# Altium PCB bldcPCB.PcbDoc
Units mm, origin at the board's own origin, x right, y up, seen from the top; angles counter-clockwise.
Board outline 70.76 x 100 mm, 2 copper layers (Top Layer, Bottom Layer); 67 components, 44 nets, 223 pads, 35 vias.
Unrouted connection lines stored in the file: 104.
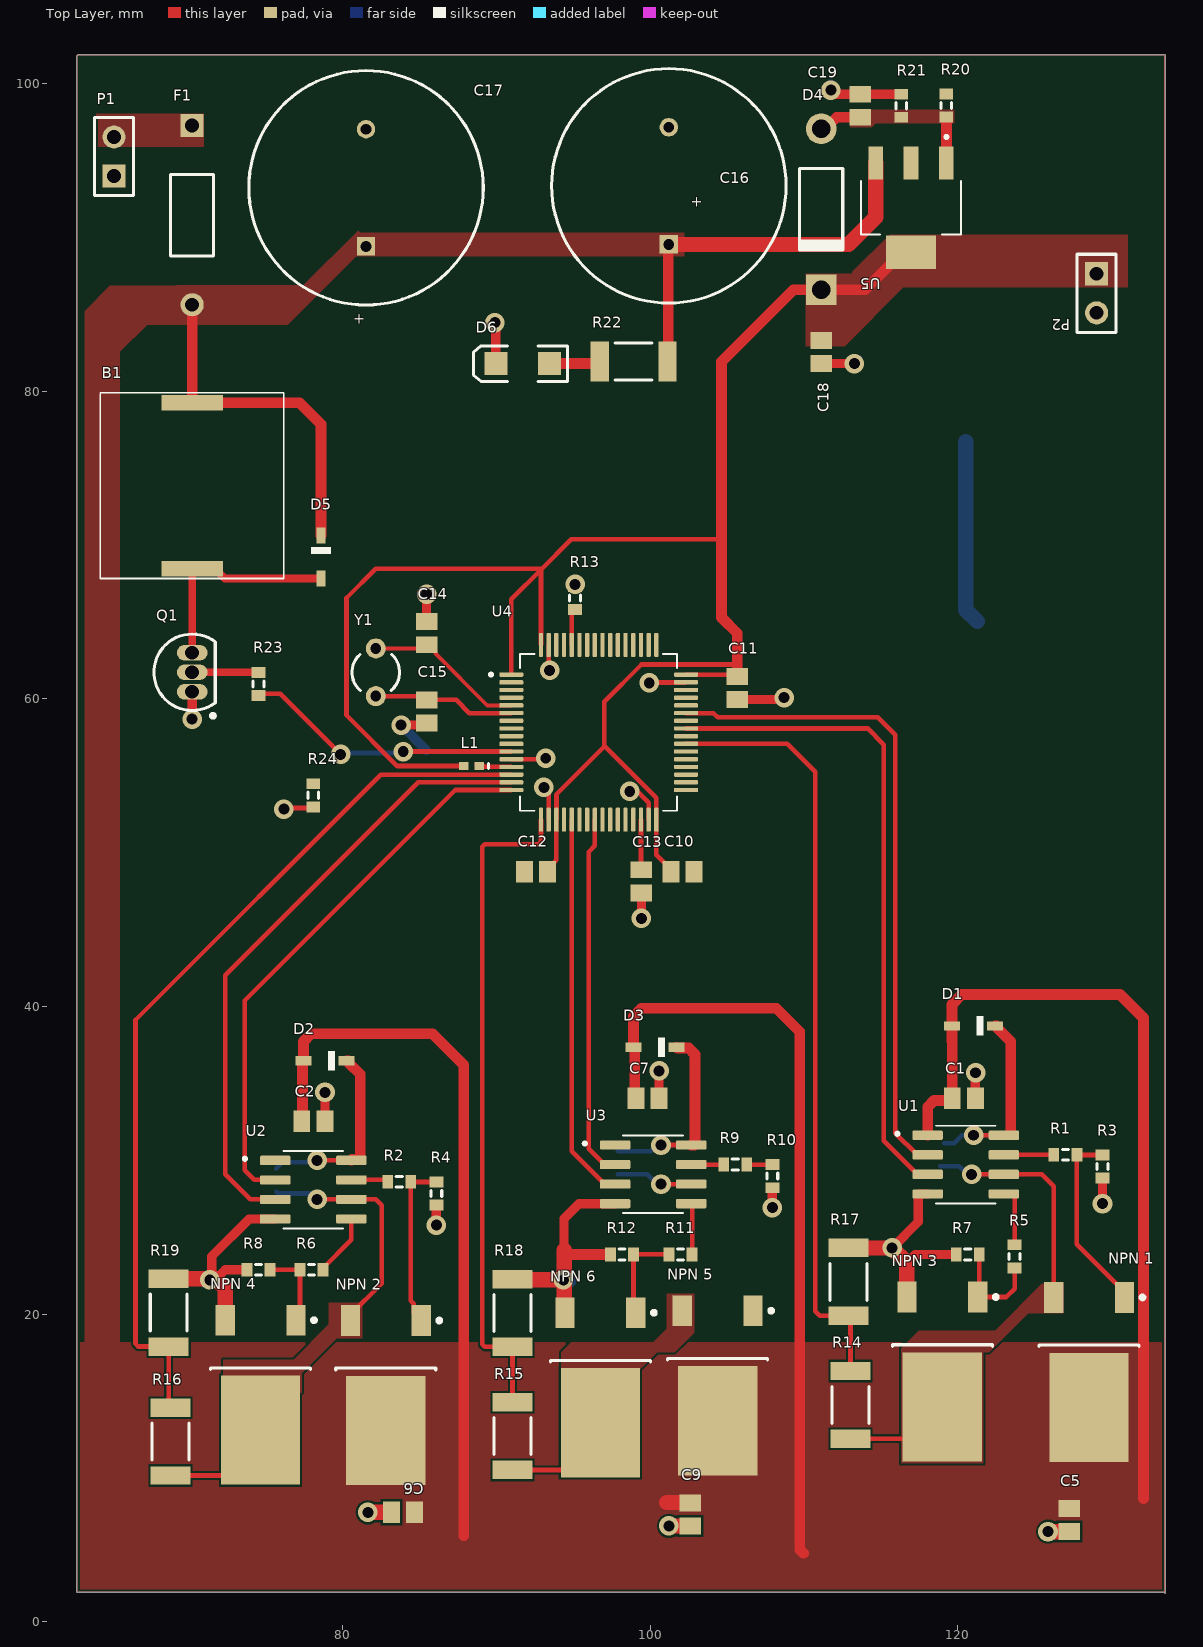
[diagram p0: Top Layer view]
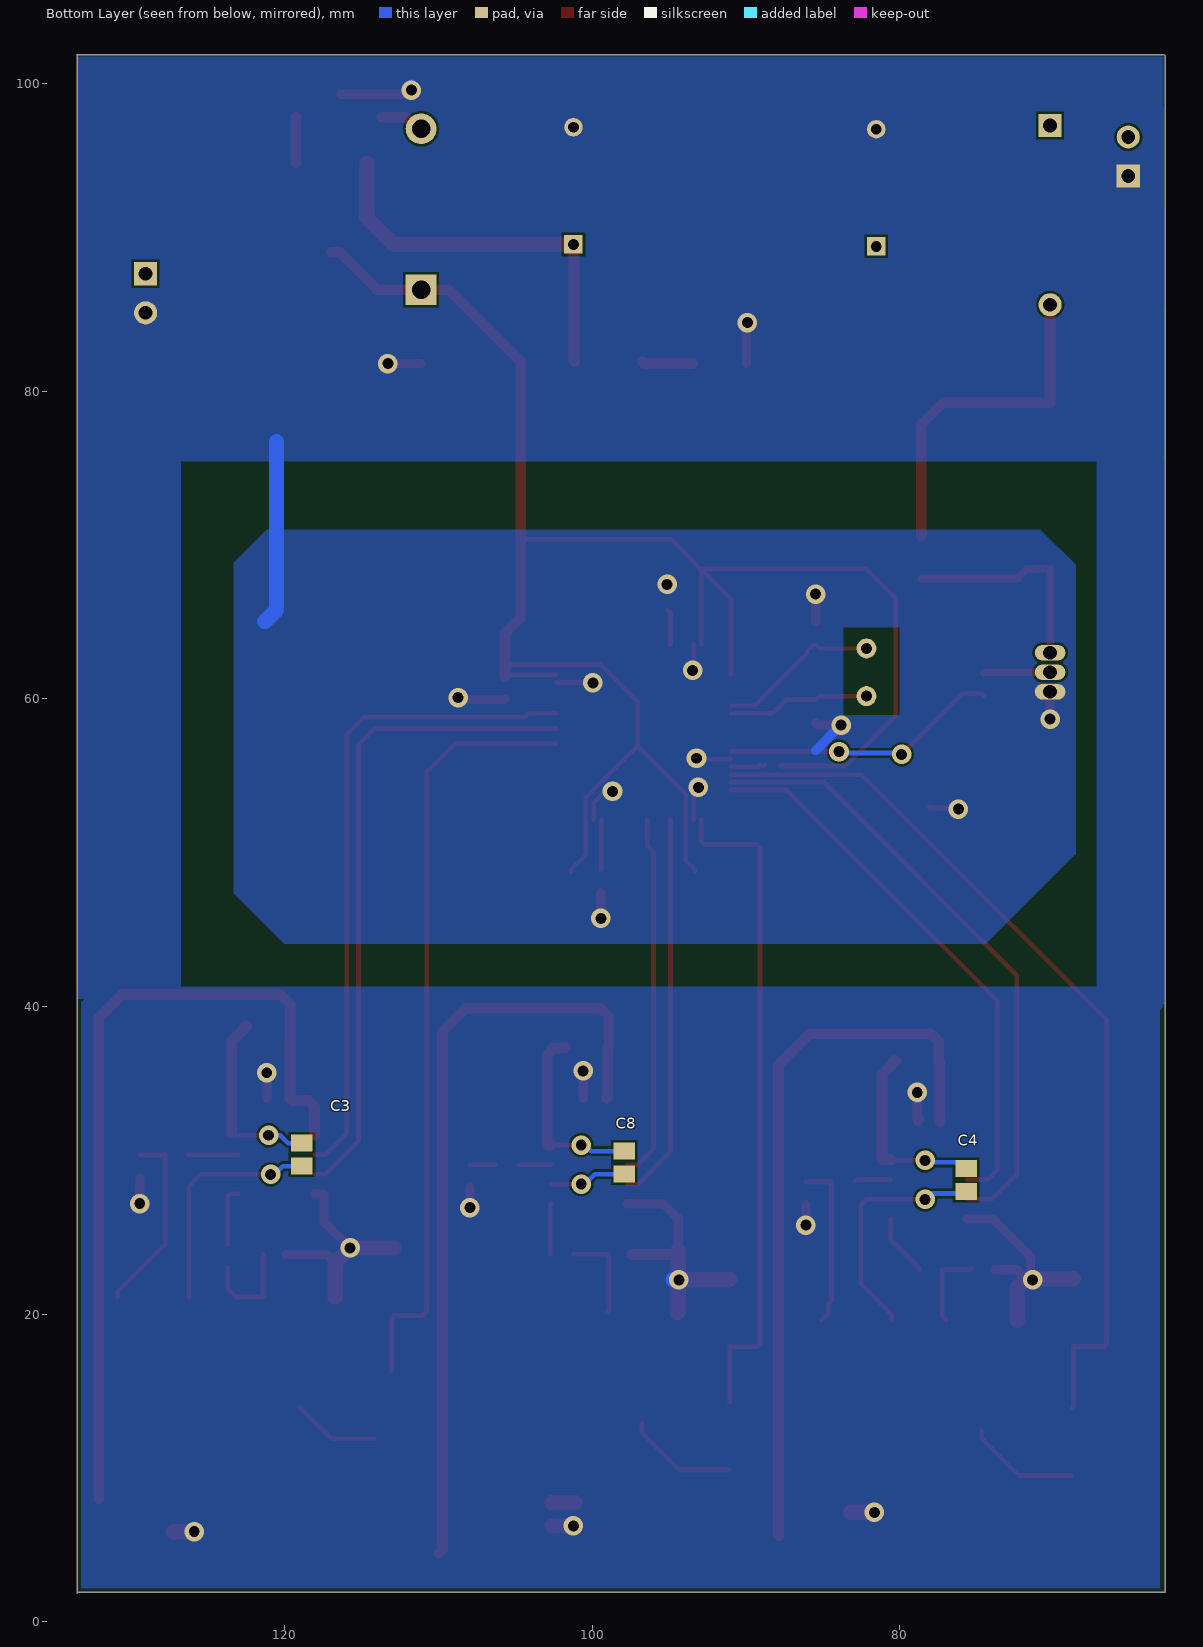
[diagram p1: Bottom Layer view, seen from below]

## Layer stack, top to bottom
Top Solder: solder mask 0.0102, Solder Resist, Dk 3.5
Top Layer: signal copper 0.0356
Dielectric 1: dielectric 0.32, FR-4, Dk 4.8
Bottom Layer: signal copper 0.0356
Bottom Solder: solder mask 0.0102, Solder Resist, Dk 3.5

## Board outline
62.738,1.905 62.738,101.795 62.797,101.854 133.5,101.854 133.477,101.859 133.477,1.859 133.431,1.905

## Design rules (kind name [scope] priority, off if disabled: settings)
Clearance [All] p1: gap=0.152 ignorepadtopadclearanceinfootprint=TRUE except(0: Arc-Hole Track-Hole SMDPad-Hole THPad-Hole Via-Hole Fill-Hole Poly-Hole Region-Hole Text-Hole)
PolygonConnect [All] p1: connectstyle=Direct reliefconductorwidth=0.254 reliefentries=4 polygonreliefangle="90 Angle" airgapwidth=0.254
RoutingVias [All] p1: holewidth=0.3 width=0.7 viastyle="Through Hole" minholewidth=0.2 minwidth=0.5 maxholewidth=0.711 maxwidth=1.27
SolderMaskExpansion [All] p1: expansion=0.102 istentingtop=FALSE
Width [All] p1: maxlimit=1 minlimit=0.254 preferedwidth=0.3
30 further rules are at their usual default settings.

## Classes and differential pairs
component class U_switch: C1 C2 C3 C4 C5 C6 C7 C8 C9 D1 D2 D3 "NPN 1" "NPN 2" "NPN 3" "NPN 4" "NPN 5" "NPN 6" R1 R2 R3 R4 R5 R6 R7 R8 R9 R10 R11 R12 U1 U2 U3
component class U_signal: B1 D5 D6 Q1 R22 R23 R24
component class U_power: C16 C17 C18 C19 D4 F1 P1 P2 R20 R21 U5
component class U_mcu: C10 C11 C12 C13 C14 C15 L1 R13 U4 Y1
component class U_currentRead: R14 R15 R16 R17 R18 R19

## Components (designator, comment, footprint, x,y, rotation, side; value= is the part's Value field where it differs from the comment)
B1 "CSPT12A03-4.0F" "Buzzer SMD" 66.167,78.232 r0 top
C1 "Cap Pol3" C0805 120.396,34.036 r0 top value="100nF 36V"
C2 "Cap Pol3" C0805 78.105,32.533 r0 top value="100nF 36V"
C3 "Cap Pol3" C0805 118.872,30.365 r270 bottom value="2.2uF 16V"
C4 "Cap Pol3" C0805 75.692,28.711 r270 bottom value="2.2uF 16V"
C5 "Cap Pol3" C0805 127.254,6.604 r270 top value="100nF 36V"
C6 "Cap Pol3" C0805 83.947,7.112 r180 top value="100nF 36V"
C7 "Cap Pol3" C0805 99.834,34.036 r0 top value="100nF 36V"
C8 "Cap Pol3" C0805 97.917,29.845 r270 bottom value="2.2uF 16V"
C9 "Cap Pol3" C0805 102.616,6.973 r270 top value="100nF 36V"
C10 "Cap Pol3" C0805 102.108,48.768 r0 top value="100nF 12V"
C11 "Cap Pol3" C0805 105.664,60.706 r270 top value="100nF 12V"
C12 "Cap Pol3" C0805 92.583,48.768 r180 top value="100nF 12V"
C13 "Cap Pol3" C0805 99.441,48.133 r270 top value="4.7uF 12V"
C14 "Cap Pol3" C0805 85.471,64.262 r90 top value="100nF 12V"
C15 "Cap Pol3" C0805 85.471,59.182 r270 top value="100nF 12V"
C16 "Cap Pol1" RB7.6-15 101.219,93.345 r270 top value="330nF 36V"
C17 "Cap Pol1" RB7.6-15 81.534,93.218 r270 top value="100nF 36V"
C18 "Cap Pol3" C0805 111.125,82.538 r270 top value="100nF 12V"
C19 "Cap Pol3" C0805 113.665,98.552 r90 top value="100nF 50V"
D1 "1N4148WS" 1N4148WS 121.031,38.735 r180 top
D2 "1N4148WS" 1N4148WS 78.867,36.47 r180 top
D3 "1N4148WS" 1N4148WS 100.33,37.338 r180 top
D4 "Diode 1N4002" DO-41 111.125,91.821 r270 top
D5 "1N4148WS" 1N4148WS 78.613,69.215 r270 top
D6 "LED2" 3.2X1.6X1.1 91.722,81.788 r180 top
F1 "3A" PIN-W2/E2.8 70.231,91.44 r270 top
L1 "Inductor" 0402-A 88.392,55.626 r180 top value=FCM1608KF-601T03
"NPN 1" "S?" "UTM2054G - duplicate" 128.538,16.232 r270 top
"NPN 2" "S?" "UTM2054G - duplicate" 82.818,14.729 r270 top
"NPN 3" "S?" "UTM2054G - duplicate" 118.999,16.256 r270 top
"NPN 4" "S?" "UTM2054G - duplicate" 74.676,14.753 r270 top
"NPN 5" "S?" "UTM2054G - duplicate" 104.394,15.367 r270 top
"NPN 6" "S?" "UTM2054G - duplicate" 96.774,15.24 r270 top
P1 "Header 2" HDR1X2 65.151,93.98 r90 top
P2 "Header 2" HDR1X2 129.032,87.63 r270 top
Q1 "2N3904" TO-92A 70.231,61.722 r0 top
R1 "Res3" J1-0603 127,30.353 r0 top value=220
R2 "Res3" J1-0603 83.693,28.596 r0 top value=220
R3 "Res3" J1-0603 129.413,29.591 r90 top value=4.7K
R4 "Res3" J1-0603 86.106,27.834 r90 top value=4.7K
R5 "Res3" J1-0603 123.698,23.749 r270 top value=220
R6 "Res3" J1-0603 77.99,22.882 r180 top value=220
R7 "Res3" J1-0603 120.65,23.876 r0 top value=4.7K
R8 "Res3" J1-0603 74.549,22.881 r0 top value=4.7K
R9 "Res3" J1-0603 105.537,29.718 r0 top value=220
R10 "Res3" J1-0603 107.95,28.968 r90 top value=4.7K
R11 "Res3" J1-0603 101.981,23.876 r180 top value=220
R12 "Res3" J1-0603 98.171,23.876 r0 top value=4.7K
R13 "Res3" J1-0603 95.123,66.548 r270 top value=10K
R14 "Res3" 12Z-2010 113.03,14.097 r270 top value=1.2K
R15 "Res3" 12Z-2010 91.059,12.065 r270 top value=1.2K
R16 "Res3" 12Z-2010 68.834,11.705 r270 top value=1.2K
R17 "Res3" 12Z-2010 112.903,22.098 r270 top value=470
R18 "Res3" 12Z-2010 91.059,20.066 r270 top value=470
R19 "Res3" 12Z-2010 68.707,20.087 r270 top value=470
R20 "Res3" J1-0603 119.253,98.564 r90 top value=240
R21 "Res3" J1-0603 116.332,98.552 r90 top value=400
R22 "Res3" 12Z-2010 98.933,81.915 r180 top value=470
R23 "Res3" J1-0603 74.549,60.96 r270 top value=10K
R24 "Res3" J1-0603 78.105,53.721 r90 top value=4.7K
U1 "IR2101 SOIC-8" IR2101 120.523,29.718 r0 top
U2 "IR2101 SOIC-8" IR2101 78.105,28.088 r0 top
U3 "IR2101 SOIC-8" IR2101 100.203,29.083 r0 top
U4 "STM32F446RET6" STM32F4 96.659,57.82 r0 top
U5 "LM1117MP-2.5" "LM1117 SMD" 116.967,91.927 r270 top
Y1 "XTAL" R38 82.169,61.722 r0 top

## Footprints (in the part's own frame and the unit in brackets; to place one, negate y for a bottom-side part, rotate by r counter-clockwise, add the part's x,y. Pads: shape width x height; smd on the part's side, far side on the other; paste and mask are expansions set on the pad)
1N4148WS [mm] "SMD DIODE"
  rect 1.05x0.6 smd: A(1.4,0) C(-1.4,0)
  silkscreen extent -0.63,-0.63 -0.2,0.63, body extent -1.25,-0.64 1.25,0.62, height 0.7
3.2X1.6X1.1 [mm] "SMT LED; 2 Flat Leads"
  rect 1.5x1.5 smd: 1(-1.75,0) 2(1.75,0)
  silkscreen extent -2.9,-1.15 3.2,1.15
12Z-2010 [mm] "Chip Resistor, Body 5.0x2.5mm, IPC High Density"
  rect 1.2x2.6 smd: 1(-2.2,0) 2(2.2,0)
  silkscreen extent -1.2,-1.2 1.2,1.2, body extent -2.58,-1.33 2.58,1.33, height 0.9
0402-A [mm] "Chip Inductor, Body 1.0x0.5mm, IPC High Density"
  rect 0.6x0.5 smd: 1(-0.5,0) 2(0.5,0)
  silkscreen extent -1.1,-0.15 -1.1,0.15, body extent -0.55,-0.3 0.55,0.3, height 0.55
"Buzzer SMD" [mm] "3V 5MM 85dB 7.5X7.5X2 SMD Buzzer"
  rect 4x1 smd: 1(4.064,1.016) 2(4.064,-9.779)
  silkscreen extent -1.91,-10.41 10.03,1.65, body extent -1.96,-10.46 10.08,1.7, height 0.51
C0805 [mm] "Chip Capacitor, Body 2.0x1.3mm, IPC High Density"
  rect 1.1x1.4 smd: 1(-0.75,0) 2(0.75,0)
  body extent -1.1,-0.72 1.1,0.72, height 1.4
DO-41 [mm] "Diode, Axial; Body 5.2 x 2.7 mm (LxDia. max), Lead Dia. 0.86 mm (max)"
  round 2 hole 1.2: 1(-5.23,0)
  rect 2x2 hole 1.2: 2(5.23,0)
  silkscreen extent -2.65,-1.4 2.75,1.4
HDR1X2 [mm] "Connector; Header; 2 Position"
  rect 1.5x1.5 hole 0.9: 1(0,0)
  round 1.5 hole 0.9: 2(2.54,0)
  silkscreen extent -1.27,-1.27 3.81,1.27
IR2101 [mm] "SOIC-8 FET DRIVER"
  rrect25% 1.97x0.6 smd: 1(-2.475,1.905) 2(-2.475,0.635) 3(-2.475,-0.635) 4(-2.475,-1.905) 5(2.475,-1.905) 6(2.475,-0.635) 7(2.475,0.635) 8(2.475,1.905)
  silkscreen extent -4.54,-2.52 1.95,2.52
J1-0603 [mm] "Chip Resistor, Body 1.6x0.8mm, IPC High Density"
  rect 0.7x0.9 smd: 1(-0.75,0) 2(0.75,0)
  silkscreen extent -0.2,-0.35 0.2,0.35, body extent -0.85,-0.48 0.85,0.48, height 0.9
"LM1117 SMD" [mm] "0.8A SMD REGULATOR"
  rect 2.15x0.95 smd: 1(-2.9,2.3) 2(-2.9,0) 3(-2.9,-2.3)
  rect 2.15x3.25 smd: 4(2.9,0)
  silkscreen extent -4.7,-3.25 1.75,3.25, body extent -3.5,-3.12 3.5,3.38, height 1.8
PIN-W2/E2.8 [mm] "Thru-Hole; 2 Leads"
  rect 1.5x1.5 hole 0.9: 1(-5.825,0)
  round 1.5 hole 0.9: 2(5.825,0)
  silkscreen extent -2.65,-1.4 2.65,1.4
R38 [mm] "Crystal, Thru-Hole; 2 Leads; Body 3.1 x 8.2 mm (Dia.xH)"
  round 1.3 hole 0.7: 1(0,1.55) 2(0,-1.55)
  silkscreen extent -1.55,-1.19 1.55,1.17
RB7.6-15 [mm] "Polarized Capacitor (Radial); 2 Leads"
  rect 1.2x1.2 hole 0.7: 1(3.81,0)
  round 1.2 hole 0.7: 2(-3.81,0)
  silkscreen extent -7.62,-7.62 7.62,7.62
STM32F4 [mm]
  rrect50% 1.56x0.28 smd: 1(-5.68,3.75) 2(-5.68,3.25) 3(-5.68,2.75) 4(-5.68,2.25) 5(-5.68,1.75) 6(-5.68,1.25) 7(-5.68,0.75) 8(-5.68,0.25) 9(-5.68,-0.25) 10(-5.68,-0.75) 11(-5.68,-1.25) 12(-5.68,-1.75) 13(-5.68,-2.25) 14(-5.68,-2.75) 15(-5.68,-3.25) 16(-5.68,-3.75) 33(5.68,-3.75) 34(5.68,-3.25) 35(5.68,-2.75) 36(5.68,-2.25) 37(5.68,-1.75) 38(5.68,-1.25) 39(5.68,-0.75) 40(5.68,-0.25) 41(5.68,0.25) 42(5.68,0.75) 43(5.68,1.25) 44(5.68,1.75) 45(5.68,2.25) 46(5.68,2.75) 47(5.68,3.25) 48(5.68,3.75)
  rrect50% 0.28x1.56 smd: 17(-3.75,-5.68) 18(-3.25,-5.68) 19(-2.75,-5.68) 20(-2.25,-5.68) 21(-1.75,-5.68) 22(-1.25,-5.68) 23(-0.75,-5.68) 24(-0.25,-5.68) 25(0.25,-5.68) 26(0.75,-5.68) 27(1.25,-5.68) 28(1.75,-5.68) 29(2.25,-5.68) 30(2.75,-5.68) 31(3.25,-5.68) 32(3.75,-5.68) 49(3.75,5.68) 50(3.25,5.68) 51(2.75,5.68) 52(2.25,5.68) 53(1.75,5.68) 54(1.25,5.68) 55(0.75,5.68) 56(0.25,5.68) 57(-0.25,5.68) 58(-0.75,5.68) 59(-1.25,5.68) 60(-1.75,5.68) 61(-2.25,5.68) 62(-2.75,5.68) 63(-3.25,5.68) 64(-3.75,5.68)
  silkscreen extent -7.1,-5.1 5.1,5.1
TO-92A [mm] "TO, Flat Index; 3 In-Line, Axial Leads; Body Dia. 4.5mm; Leads 0.51 x 0.48 mm (max)"
  oval 2x1 hole 0.9: 1(0,-1.27) 2(0,0) 3(0,1.27)
  silkscreen extent -2.48,-2.95 1.5,2.48, body extent -2.48,-2.5 1.5,2.5, height 6.86
"UTM2054G - duplicate" [mm] "D-PAK, 3-Pads, Body 6,15x6,61mm (max), IPC Medium Density"
  rect 2x1.25 smd: 1(-4.85,2.3) 3(-4.85,-2.3)
  rect 7.1x5.15 smd: 2(2.3,0)
  silkscreen extent -4.97,-3.25 -1.65,3.6, body extent -1.75,-3.25 4.35,3.25, height 2.31

## Part data
B1: library part "Buzzer SMD 5MM", "12V 1mA 5MM 85dB 7.5X7.5X2 SMD Buzzer without circuit"
C1 C2 C3 C4 C5 C6 C7 C8 C9 C10 C11 C12 C13 C14 C15 C18 C19: "Polarized Capacitor (Surface Mount)", LatestRevisionDate=29-May-2009, LatestRevisionNote="IPC-7351 Footprint Added.", PackageDescription="Chip Capacitor", PackageReference=C0805, Published=8-Jun-2000, Publisher="Altium Limited"
C16 C17: "Polarized Capacitor (Radial)", LatestRevisionDate=17-Jul-2002, LatestRevisionNote="Re-released for DXP Platform.", PackageDescription="Polarized Capacitor (Radial); 2 Leads", PackageReference=RB7.6-15, Published=8-Jun-2000, Publisher="Altium Limited"
D1 D2 D3 D5: "Diode Standard 75V 150mA Surface Mount SOD-323F", Package="SOD-323FL-2 ON Semiconductor", Availability=Good, Check_prices=https://www.snapeda.com/parts/1N4148WS/ON%20Semiconductor/view-part/2747266/?ref=eda, MF="ON Semiconductor", MP=1N4148WS, Price=None, Purchase-URL=https://pricing.snapeda.com/search/part/1N4148WS/?ref=eda, SnapEDA_Link=https://www.snapeda.com/parts/1N4148WS/ON%20Semiconductor/view-part/2747266/?ref=snap
D4: library part "Diode 1N4007", "1 Amp General Purpose Rectifier", Code_JEDEC=DO-204-AL, ComponentLink1Description="Manufacturer Link", ComponentLink1URL=http://www.fairchildsemi.com/, ComponentLink2Description=Datasheet, ComponentLink2URL=http://www.fairchildsemi.com/ds/1N%2F1N4001.pdf, DatasheetVersion=1998, LatestRevisionDate=17-Jul-2002, LatestRevisionNote="Re-released for DXP Platform.", PackageDescription="Diode, Axial; Body 5.2 x 2.7 mm (LxDia. max), Lead Dia. 0.86 mm (max)", PackageReference=DO-41, PackageVersion=Aug-1999, Published=8-Jun-2000, Publisher="Altium Limited"
D6: "Typical RED, GREEN, YELLOW, AMBER GaAs LED", LatestRevisionDate=17-Jul-2002, LatestRevisionNote="Re-released for DXP Platform.", PackageDescription="SM LED; 2 Flat Leads", PackageReference=3.2X1.6X1.1, PackageVersion=Feb-2002, Published=8-Jun-2000, Publisher="Altium Limited"
F1: library part "Fuse 2", "Fuse", LatestRevisionDate=17-Jul-2002, LatestRevisionNote="Re-released for DXP Platform.", PackageDescription="Thru-Hole; 2 Leads", PackageReference=PIN-W2/E2.8, Published=8-Jun-2000, Publisher="Altium Limited"
"NPN 1" "NPN 2" "NPN 3" "NPN 4" "NPN 5" "NPN 6": library part UTM2054
P1 P2: "Header, 2-Pin", LatestRevisionDate=17-Jul-2002, LatestRevisionNote="Re-released for DXP Platform.", Publisher="Altium Limited"
Q1: "NPN General Purpose Amplifier", ComponentLink1Description="Manufacturer Link", ComponentLink1URL=http://www.fairchildsemi.com/, ComponentLink2Description=Datasheet, ComponentLink2URL=http://www.fairchildsemi.com/ds/2N%2F2N3904.pdf, DatasheetVersion=1997, LatestRevisionDate=15-Jan-2003, LatestRevisionNote="PCB Footprint 'BCY-W3/D4.7' replaced", PackageDescription="TO, Flat Index; 3 In-Line, Axial Leads; Body Dia. 4.5mm; Leads 0.51 x 0.48 mm (max)", PackageReference=TO-92A, PackageVersion=Sep-1998, Published=8-Jun-2000, Publisher="Altium Limited"
R1 R2 R3 R4 R5 R6 R7 R8 R9 R10 R11 R12 R13 R14 R15 R16 R17 R18 R19 R20 R21 R22 R23 R24: "Resistor", LatestRevisionDate=29-May-2009, LatestRevisionNote="IPC-7351 Footprint Added.", PackageDescription="Chip Resistor", PackageReference=J1-0603, Published=8-Jun-2000, Publisher="Altium Limited"
U1 U2 U3: "Half-Bridge Gate Driver IC Non-Inverting 8-SOIC", Package="SOIC-8 Infineon", Availability=Unavailable, BuyPart=https://www.snapeda.com/parts/IR2101S/Infineon%20Technologies/view-part/589975/?ref=eda, MF="Infineon Technologies", MP=IR2101S, Price=None, SnapEDA_Link=https://www.snapeda.com/parts/IR2101S/Infineon%20Technologies/view-part/589975/?ref=snap
U4: "MCU 32-Bit STM32 ARM Cortex M4 RISC 512KB Flash 2.5V/3.3V 64-Pin LQFP Tray", Package=None, Availability=Unavailable, MP=STM32F446RET6, Price=None
U5: "800-mA 15-V linear voltage regulator 4-SOT-223 0 to 125", Package="SOT-223-4 Texas Instruments", Availability=Warning, Check_prices=https://www.snapeda.com/parts/LM1117MP-2.5/NOPB/Texas%20Instruments/view-part/108187/?ref=eda, MF="Texas Instruments", MP=LM1117MP-2.5/NOPB, Price=None, Purchase-URL=https://pricing.snapeda.com/search/part/LM1117MP-2.5/NOPB/?ref=eda, SnapEDA_Link=https://www.snapeda.com/parts/LM1117MP-2.5/NOPB/Texas%20Instruments/view-part/108187/?ref=snap
Y1: "Crystal Oscillator", LatestRevisionDate=17-Jul-2002, LatestRevisionNote="Re-released for DXP Platform.", PackageDescription="Crystal, Thru-Hole; 2 Leads; Body 3.1 x 8.2 mm (Dia.xH)", PackageReference=R38, Published=8-Jun-2000, Publisher="Altium Limited"
L1: Code_JEITA=0402, Code_IEC=1005, LatestRevisionDate=29-May-2009, LatestRevisionNote="IPC-7351 Footprint Added.", PackageDescription="Chip Inductor", PackageReference=0402-A, Published=8-Jun-2000, Publisher="Altium Limited"

## Via types
v1: diameter 1.27, hole 0.711, Top Layer to Bottom Layer, 35 vias

## Nets (pads, with @x,y where several pads share a name; then routed paths per layer and width w, separated by ;. In a path a pad name is that pad's centre, name@x,y a point inside that pad or via, vN(x,y) a via of type N, cw(c..) or ccw(c..) an arc to the next point about the centre after c; other vN are vias at no path point)
+3.3: C10.1 C11.1 C12.1 C18.1 D4.2 L1.2 P2.1 R20.2 U4.1 U4.19 U4.32 U4.48 U4.64 U5.4 | length 126.7
  Top Layer w0.3: L1.2@87.724,55.626 83.566,55.626 80.264,58.928 80.264,66.548 82.169,68.453 92.964,68.453 ; U4.1 90.979,66.468 92.909,68.398 ; U4.64 92.909,68.398 ; C12.1 93.333,48.918 93.909,49.494 U4.19 93.919,52.15 93.919,53.787 97.028,56.896 97.028,56.951 ; C10.1 101.358,48.918 100.409,49.867 U4.32 100.409,53.57 97.028,56.951 ; U4.48 105.55,61.57 C11.1 ; 104.648,70.358 94.869,70.358 92.909,68.398 ; 105.664,62.23 99.441,62.23 97.028,59.817 97.028,56.951
  Top Layer w0.7: C11.1 105.664,62.23 105.664,64.262 104.648,65.278 104.648,70.358 104.648,81.915 109.324,86.591 D4.2 113.981,86.591 116.417,89.027 U5.4
+12: "NPN 1.2" "NPN 2.2" "NPN 5.2" B1.1 C1.1 C2.1 C5.1 C6.1 C7.1 C9.1 C16.1 C17.1 D1.A D2.A D3.A D5.C F1.2 R22.1 U1.1 U2.1 U3.1 U5.3 | length 202.2
  Top Layer w0.7: F1.2 B1.1 77.216,79.248 78.613,77.851 D5.C ; C2.1 77.411,32.59 77.411,36.42 77.461,36.47 D2.A 77.467,37.722 77.972,38.227 85.852,38.227 87.884,36.195 87.884,5.588 ; C7.1 99.007,34.113 99.007,37.288 98.957,37.338 D3.A 98.93,39.367 99.441,39.878 108.204,39.878 109.728,38.354 109.728,4.699 109.982,4.445 ; R22.1 101.176,81.958 101.176,89.492 C16.1 ; U1.1 118.048,33.466 118.458,33.876 119.486,33.876 C1.1 119.639,34.044 119.639,37.711 119.631,37.719 D1.A 119.631,40.129 120.269,40.767 130.556,40.767 132.08,39.243 132.08,8.001
  Top Layer w1: 101.092,7.747 102.592,7.747 C9.1 ; C16.1 112.903,89.535 114.667,91.299 U5.3
A: R14.1 R17.2 U4.39 | length 50.1
  Top Layer w0.3: U4.39 108.919,57.07 110.744,55.245 110.744,20.193 111.039,19.898 R17.2 113.03,19.771 R14.1
B: R15.1 R18.2 U4.17 | length 43.4
  Top Layer w0.3: R15.1 R18.2 89.266,17.866 89.09,18.042 89.09,50.37 89.266,50.546 92.733,50.546 92.909,50.722 U4.17
C: R16.1 R19.2 U4.14 | length 58.4
  Top Layer w0.3: R16.1 68.707,14.032 R19.2 66.724,17.887 66.548,18.063 66.548,39.116 82.502,55.07 U4.14
COMM: "NPN 3.3" "NPN 4.3" "NPN 6.3" C1.2 C2.2 C5.2 C6.2 C7.2 C9.2 C11.2 C13.2 C14.2 C15.2 C16.2 C17.2 C18.2 C19.2 D6.2 P1.1 P2.2 Q1.1 R3.1 R4.1 R7.1 R8.1 R10.1 R12.1 R13.1 R17.1 R18.1 R19.1 R21.2 R24.1 U1.4 U2.4 U3.4 U4.12 U4.18 U4.31 U4.47 U4.63 | length 109
  Top Layer w0.3: v1(76.2,52.832) 76.269,52.901 78.035,52.901 R24.1 ; U4.12 93.154,56.07 v1(93.218,56.134) ; v1(93.098,54.238) 93.409,53.926 U4.18 ; U4.63 93.409,61.912 v1(93.472,61.849) ; v1(98.679,53.975) 99.165,53.975 99.909,53.231 U4.31 ; v1(99.949,61.039) 99.97,61.06 102.329,61.06 U4.47
  Top Layer w0.6: v1(70.231,58.674) Q1.1 ; v1(71.374,22.225) 71.501,22.352 71.501,23.749 73.935,26.183 U2.4 ; v1@71.79,22.287 72.384,22.882 R8.1 ; C2.2 78.74,32.649 78.867,32.776 v1(78.867,34.417) ; v1(83.82,58.293) 85.356,58.293 85.344,58.305 C15.2 ; C14.2 v1(85.471,66.802) ; v1(86.106,25.781) R4.1 ; v1(89.916,84.455) 89.972,84.399 D6.2 ; 94.413,24.148 94.413,26.214 95.377,27.178 U3.4 ; R13.1 v1(95.123,67.437) ; v1(99.441,45.72) C13.2 ; C7.2 v1(100.584,35.814) ; C11.2 108.597,59.956 v1(108.712,60.071) ; v1(107.95,26.924) R10.1 ; C18.2 v1(113.284,81.788) ; v1(111.76,99.568) 112.026,99.302 C19.2 R21.2 ; v1(115.738,24.298) 117.438,25.998 117.438,27.813 U1.4 ; 116.699,23.337 117.238,23.876 R7.1 ; C1.2 121.146,35.675 v1(121.158,35.687) ; v1(129.413,27.178) R3.1
  Top Layer w0.7: 94.413,23.622 94.667,23.876 R12.1
  Top Layer w1: R19.1 71.79,22.287 72.376,21.702 72.376,19.603 ; v1(81.661,7.112) C6.2 ; R18.1 91.1,22.225 v1(94.361,22.225) ; 94.413,24.148 94.413,23.622 94.413,22.277 v1(94.361,22.225) ; 94.474,20.09 94.413,20.151 94.413,22.173 v1(94.361,22.225) ; v1(101.219,6.223) C9.2 ; R17.1 v1(115.738,24.298) 116.699,23.337 116.699,21.106 ; v1(125.869,5.854) C5.2
  Bottom Layer w0.6: v1@78.867,34.036 v1(78.867,34.417) ; v1(83.82,58.293) 85.471,56.642 ; v1(95.123,67.437) v1@95.123,67.691 ; v1(111.76,99.568) v1@111.76,99.949 ; v1(113.284,81.788) v1@113.538,82.042
  Bottom Layer w1: v1(94.361,22.225) v1@94.742,22.225 ; 120.523,76.708 120.523,65.786 121.285,65.024 ; v1@125.857,5.842 v1(125.869,5.854)
H_1: U1.2 U4.43 | length 42.8
  Top Layer w0.3: U4.43 104.125,59.07 104.394,58.801 114.808,58.801 115.951,57.658 115.951,31.765 117.363,30.353 U1.2
H_2: U3.2 U4.24 | length 23.7
  Top Layer w0.3: U4.24 96.409,50.435 96.012,50.038 96.012,30.749 97.043,29.718 U3.2
H_3: U2.2 U4.16 | length 36.3
  Top Layer w0.3: U2.2 74.274,28.723 73.66,29.337 73.66,40.386 87.344,54.07 U4.16
L_1: U1.3 U4.41 | length 42.8
  Top Layer w0.3: U4.41 114.142,58.07 115.189,57.023 115.189,31.257 117.363,29.083 U1.3
L_2: U3.3 U4.21 | length 25.3
  Top Layer w0.3: U4.21 94.909,30.582 97.043,28.448 U3.3
L_3: U2.3 U4.15 | length 40.6
  Top Layer w0.3: U2.3 74.02,27.453 72.39,29.083 72.39,42.037 84.923,54.57 U4.15
NetB1_2: B1.2 D5.A Q1.3 | length 14.1
  Top Layer w0.5: Q1.3 B1.2 71.731,68.453 72.369,67.815 D5.A
NetC3_1: C3.1 D1.C U1.8 | length 12
  Top Layer w0.3: v1(121.031,31.623) U1.8 123.294,31.623 U1.8@123.444,31.773
  Top Layer w0.7: D1.C 122.556,38.735 122.606,38.685 122.606,38.56 123.444,37.722 U1.8@123.444,31.773
  Bottom Layer w0.3: C3.1@119.126,31.115 119.773,31.115 120.281,31.623 v1(121.031,31.623)
NetC3_2: "NPN 1.3" "NPN 3.2" C3.2 R14.2 U1.6 | length 20.8
  Top Layer w0.3: R14.2@114.173,11.897 116.94,11.897 118.999,13.956 ; v1(120.904,29.083) U1.6 125.476,29.083 126.238,28.321 126.238,21.082
  Bottom Layer w0.3: C3.2 120.11,29.615 120.642,29.083 v1(120.904,29.083)
NetC4_1: C4.1 D2.C U2.8 | length 12.6
  Top Layer w0.3: v1(78.359,29.993) U2.8
  Top Layer w0.7: D2.C 80.392,36.47 80.442,36.42 80.442,36.296 81.153,35.584 81.153,30.044 80.63,30.044 U2.8
  Bottom Layer w0.3: C4.1 76.092,29.861 78.227,29.861 v1(78.359,29.993)
NetC4_2: "NPN 2.3" "NPN 4.2" C4.2 R16.2 U2.6 | length 22.9
  Top Layer w0.3: R16.2 72.251,9.505 74.676,11.93 74.676,12.453 ; v1(78.359,27.453) U2.6 82.169,27.453 82.55,27.072 82.55,21.986 80.518,19.954 80.518,19.579
  Bottom Layer w0.3: C4.2 75.819,27.834 77.978,27.834 v1(78.359,27.453)
NetC8_1: C8.1 D3.C U3.8 | length 12.4
  Top Layer w0.3: v1(100.711,30.988) U3.8
  Top Layer w0.7: D3.C 101.78,37.288 102.51,37.288 102.92,36.878 102.92,31.038 102.87,30.988 U3.8
  Bottom Layer w0.3: C8.1 100.056,30.595 100.449,30.988 v1(100.711,30.988)
NetC8_2: "NPN 5.3" "NPN 6.2" C8.2 R15.2 U3.6 | length 12.4
  Top Layer w0.3: R15.2 94.349,9.865 96.774,12.29 96.774,12.94 ; v1(100.711,28.448) U3.6
  Bottom Layer w0.3: C8.2 99.824,29.095 100.471,28.448 v1(100.711,28.448)
NetC10_2: C10.2 C12.2
NetC13_1: C13.1 U4.30 | length 3.3
  Top Layer w0.3: U4.30 99.409,48.915 C13.1
NetC14_1: C14.1 U4.5 Y1.1 | length 10.6
  Top Layer w0.254: Y1.1 85.231,63.272 C14.1 85.621,63.512 86.044,63.089 86.044,62.939 89.413,59.57 U4.5
NetC15_1: C15.1 U4.6 Y1.2 | length 9.3
  Top Layer w0.3: Y1.2 85.231,60.172 C15.1 87.388,59.932 88.25,59.07 U4.6
NetC19_1: C19.1 D4.1 R20.1 R21.1 U5.1 | length 5.9
  Top Layer w0.7: D4.1 111.385,97.051 112.136,97.802 C19.1 ; R20.1 119.267,97.814 U5.1
NetD6_1: D6.1 R22.2 | length 3.3
  Top Layer w0.7: D6.1 96.606,81.788 R22.2
NetL1_1: L1.1 U4.13 | length 2.2
  Top Layer w0.3: L1.1@88.742,55.726 88.842,55.626 L1.1 ; L1.1@89.048,55.732 89.21,55.57 U4.13
"NetNPN 1_1": "NPN 1.1" R1.2 R3.2 | length 12.2
  Top Layer w0.3: R3.2 127.762,30.341 R1.2 127.75,24.545 130.838,21.457 130.838,21.082
"NetNPN 2_1": "NPN 2.1" R2.2 R4.2 | length 11
  Top Layer w0.3: 85.118,19.579 84.643,20.054 84.643,20.661 84.443,20.861 R2.2 84.455,28.584 R4.2
"NetNPN 3_1": "NPN 3.1" R5.2 R7.2 | length 6.8
  Top Layer w0.3: R7.2 121.4,21.207 121.299,21.106 123.166,21.106 123.698,21.638 R5.2
"NetNPN 4_1": "NPN 4.1" R6.2 R8.2 | length 5.4
  Top Layer w0.3: R8.2@75.299,23.009 75.426,22.881 R6.2 77.24,19.867 76.976,19.603
"NetNPN 5_1": "NPN 5.1" R9.2 R10.2 | length 1.7
  Top Layer w0.3: R9.2 R10.2
"NetNPN 6_1": "NPN 6.1" R11.2 R12.2 | length 6.2
  Top Layer w0.3: 99.074,20.09 98.921,20.243 R12.2 R11.2
NetQ1_2: Q1.2 R23.1 R24.2 | length 4.3
  Top Layer w0.5: Q1.2 70.237,61.716 74.543,61.716 R23.1
NetR1_1: R1.1 U1.7 | length 3.3
  Top Layer w0.3: U1.7 R1.1
NetR2_1: R2.1 U2.7 | length 2.4
  Top Layer w0.3: U2.7 82.816,28.723 R2.1
NetR5_1: R5.1 U1.5 | length 3.9
  Top Layer w0.3: U1.5 123.548,27.813 123.698,27.663 R5.1
NetR6_1: R6.1 U2.5 | length 4.1
  Top Layer w0.3: R6.1 78.74,22.981 80.58,24.821 U2.5
NetR9_1: R9.1 U3.7 | length 2.1
  Top Layer w0.3: U3.7 R9.1
NetR11_1: R11.1 U3.5 | length 3.3
  Top Layer w0.3: U3.5 102.731,27.125 R11.1
NetR13_2: R13.2 U4.60 | length 2.4
  Top Layer w0.3: U4.60 94.909,65.598 95.109,65.798 R13.2
NetR23_2: R23.2 U4.11 | length 18.3
  Top Layer w0.3: R23.2 74.664,60.325 75.946,60.325 v1(79.883,56.388) ; v1(83.954,56.563) 83.961,56.57 U4.11
  Bottom Layer w0.3: v1(79.883,56.388) 79.971,56.476 83.692,56.476 83.779,56.388 v1(83.954,56.563)
NetU4_46: U4.46
NetU4_49: U4.49
VCC: F1.1 P1.2
pads on no net: U4.2 U4.3 U4.4 U4.7 U4.8 U4.9 U4.10 U4.20 U4.22 U4.23 U4.25 U4.26 U4.27 U4.28 U4.29 U4.33 U4.34 U4.35 U4.36 U4.37 U4.38 U4.40 U4.42 U4.44 U4.45 U4.50 U4.51 U4.52 U4.53 U4.54 U4.55 U4.56 U4.57 U4.58 U4.59 U4.61 U4.62 U5.2
copper on no net: | length 341.4
  Top Layer w0.1: 133.477,101.859 133.477,97.663 133.477,1.905 133.477,1.859 133.431,1.905 124.587,1.905 62.738,1.905 62.738,2.54 62.738,101.795 62.797,101.854 133.5,101.854

## Polygon pours and split planes (outlines as drawn)
+12 on Top Layer "NONET_L-01_P-001" (solid, remove dead copper, pour order 19): 62.738,1.905 133.431,1.905 133.431,18.207 133.35,18.288 133.223,18.161 62.865,18.161 62.738,18.288
+12 on Top Layer "NONET_L-01_P-001" (solid, pour order 18): 70.739,84.328 67.31,84.328 65.532,82.55 65.532,8.255 67.945,5.842 97.028,5.842 97.79,5.08 123.571,5.08 123.698,5.207 123.698,8.001 124.333,8.636 132.08,8.636 132.461,8.255 132.461,6.985 126.238,6.985 125.857,6.604 125.857,3.302 125.349,2.794 66.294,2.794 63.246,5.842 63.246,85.2 64.917,86.871 70.739,86.865
+12 on Top Layer "NONET_L-01_P-001" (solid, pour order 17): 101.473,3.937 101.473,8.255 100.203,8.255 100.203,3.938
+12 on Top Layer "NONET_L-01_P-001" (solid, pour order 16): 85.344,3.81 85.344,8.128 85.323,8.149 84.074,8.149 84.074,3.811
+12 on Top Layer "NONET_L-01_P-001" (solid, pour order 14): 85.344,6.625 84.074,6.625 84.074,8.149 81.28,8.149 80.264,9.165 80.264,10.181 85.344,10.181
no net on Top Layer "NONET_L-01_P-001" (solid, pour order 13): 100.584,90.297
+3.3 on Top Layer "NONET_L-01_P-001" (solid, remove dead copper, pour order 12): 110.109,87.63 113.157,87.63 113.157,87.757 115.57,90.17 131.064,90.17 131.064,86.741 116.459,86.741 112.649,82.931 110.109,82.931
NetC19_1 on Top Layer "NONET_L-01_P-001" (solid, pour order 11): 113.03,98.298 119.761,98.298 119.761,97.409 114.681,97.409 114.427,97.155 113.03,97.155
+12 on Top Layer "NONET_L-01_P-001" (solid, pour order 10): 101.981,7.239 103.378,7.239 103.378,8.382 103.886,8.89 106.934,8.89 106.934,10.16 101.981,10.16
NetC8_2 on Top Layer "NONET_L-01_P-001" (solid, pour order 7): 102.87,21.336 102.87,18.796 101.6,17.526 100.457,17.526 98.933,16.002 94.234,16.002 94.234,17.526 94.869,18.161 100.203,18.161 101.092,19.05 101.092,21.336
NetC4_2 on Top Layer "NONET_L-01_P-001" (solid, pour order 5): 72.263,14.88 77.343,14.88 77.343,16.15 79.629,18.436 81.28,18.436 81.28,20.595 81.153,20.722 79.121,20.722 79.121,19.325 76.835,17.039 72.263,17.039
+12 on Top Layer "NONET_L-01_P-001" (solid, pour order 4): 126.619,6.858 127.889,6.858 127.889,7.874 129.794,9.779 131.064,9.779 131.064,10.668 125.984,10.668 125.984,8.509 126.619,7.874
NetC3_2 on Top Layer "NONET_L-01_P-001" (solid, pour order 2): 126.873,21.971 126.873,20.066 124.587,20.066 122.047,17.526 121.666,17.526 121.666,10.287 116.332,10.287 116.332,17.78 117.475,18.923 122.428,18.923 125.476,21.971
+12 on Top Layer "NONET_L-01_P-001" (solid, pour order 1): 69.215,86.868 69.215,84.328 76.454,84.328 80.899,88.773 102.235,88.773 102.235,90.297 81.153,90.297 81.026,90.424 77.47,86.868
VCC on Top Layer "NONET_L-01_P-001" (solid, pour order 0): 64.008,97.917 64.135,97.79 64.135,95.885 70.993,95.885 70.993,98.044 64.008,98.044
COMM on Bottom Layer "NONET_L-01_P-001" (solid, remove dead copper, pour order 26): 80.01,67.292 80.01,58.928 83.693,58.928 83.693,64.643 90.043,70.993 121.158,70.993 123.317,68.834 123.317,47.371 120.015,44.069 74.422,44.069 68.58,49.911 68.58,68.707 70.866,70.993 79.248,70.993 79.248,68.707 82.423,65.532 88.392,65.532 89.916,67.056
COMM on Bottom Layer "NONET_L-01_P-001" (solid, pour order 28): 67.183,76.835 67.183,40.132 62.797,40.132 62.797,76.835
COMM on Bottom Layer "NONET_L-01_P-001" (solid, pour order 27): 90.17,64.643 91.059,65.532 91.059,70.993 77.47,70.993 77.343,70.866 77.343,64.643
COMM on Bottom Layer "NONET_L-01_P-001" (solid, pour order 24): 128.27,40.386 128.397,40.513 133.431,40.513 133.431,76.2 126.873,76.2 126.746,76.073 126.746,40.64
COMM on Bottom Layer "NONET_L-01_P-001" (solid, remove dead copper, pour order 23): 133.223,2.159 63.119,2.159 63.119,39.751 62.865,40.005 64.135,41.275 132.207,41.275 133.223,40.259
COMM on Bottom Layer "NONET_L-01_P-001" (solid, remove dead copper, pour order 20): 62.865,101.727 133.477,101.727 133.477,75.565 133.604,75.438 98.806,75.438 98.171,75.438 97.663,75.438 62.738,75.438

## Text inside footprints (layer, text, board x,y; h text height)
C16: Top Overlay "+" at 102.743,92.71 h0.7 r270
C17: Top Overlay "+" at 80.797,85.086 h0.7 r270